# Altium PCB LittleFOC-pcb-0.1.0.PcbDoc
Units mil, origin at the board's own origin, x right, y up, seen from the top; angles counter-clockwise.
Board outline 670.03 x 1010.03 mil, 2 copper layers (Top Layer, Bottom Layer); 24 components, 34 nets, 121 pads, 0 vias.
Unrouted connection lines stored in the file: 44.
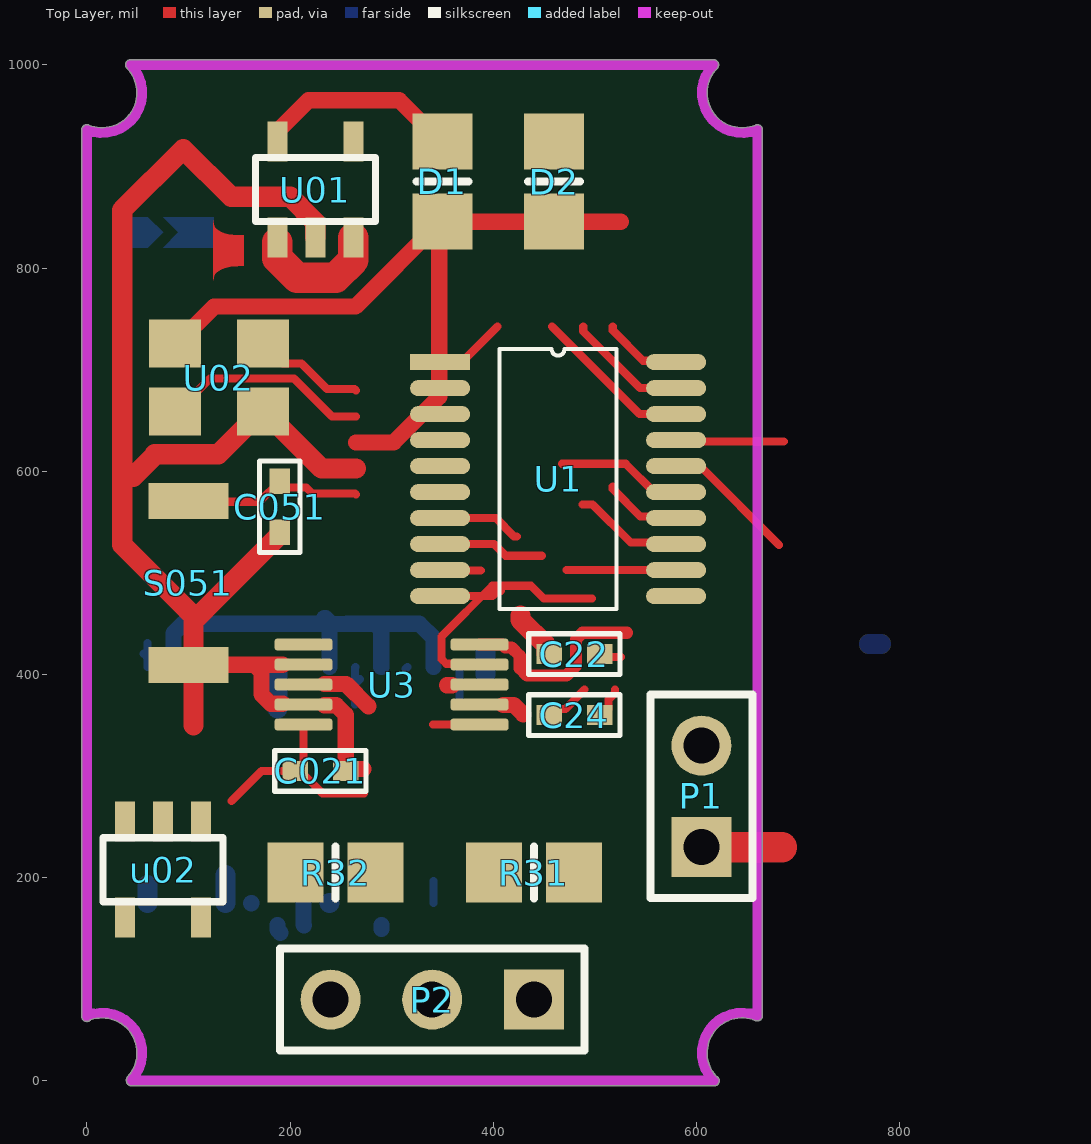
[diagram p0: Top Layer view]
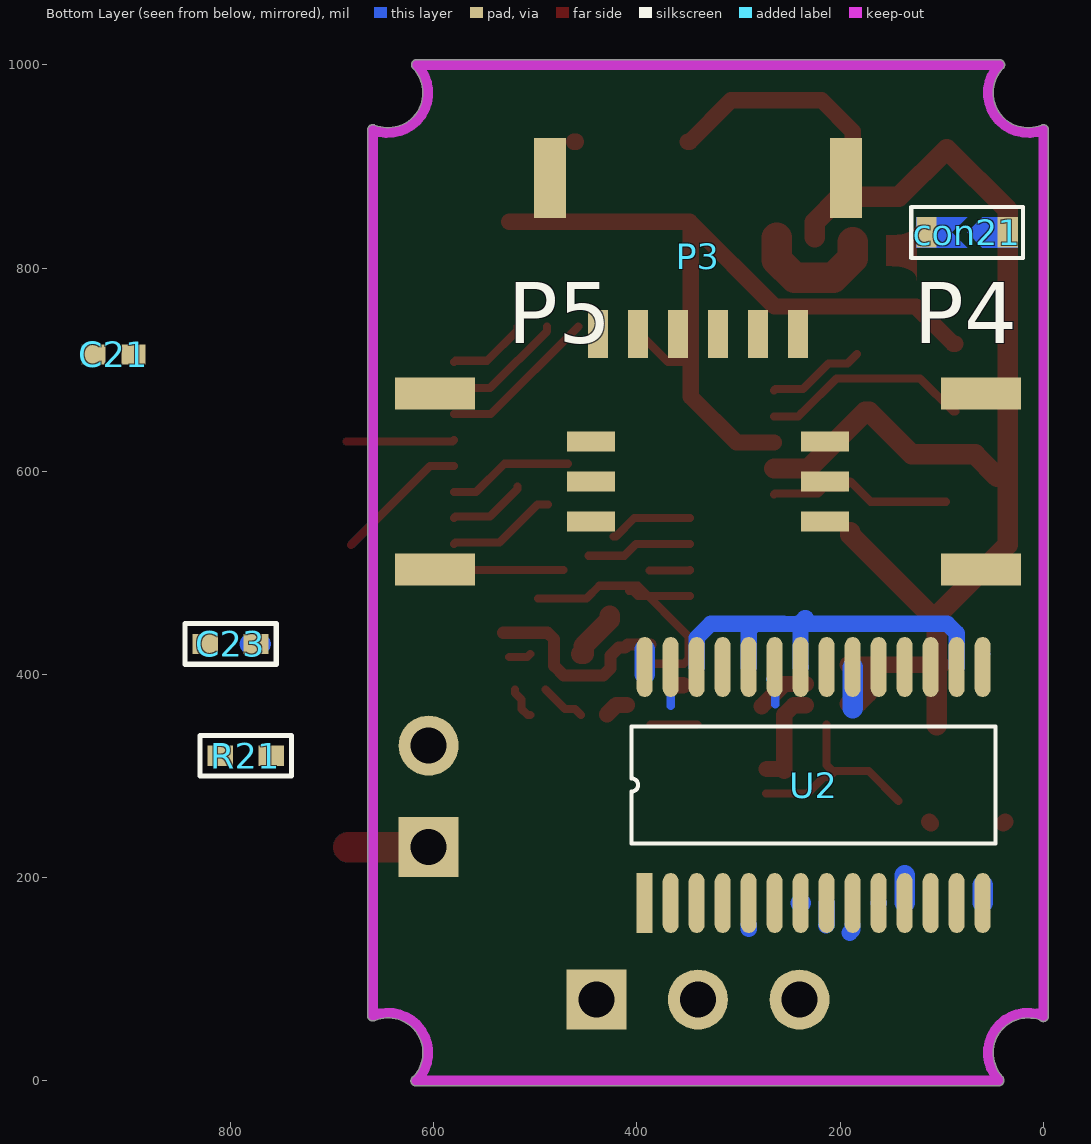
[diagram p1: Bottom Layer view, seen from below]

## Layer stack, top to bottom
Top Solder: solder mask 0.4, Solder Resist, Dk 3.5
Top Layer: signal copper 1.4
Dielectric 1: dielectric 12.6, FR-4, Dk 4.8
Bottom Layer: signal copper 1.4
Bottom Solder: solder mask 0.4, Solder Resist, Dk 3.5

## Board outline
3.71,59.99 cw(c0,63.37) -5.01,63.37 -5.01,936.06 cw(c0,936.06) 1.92,940.69 ccw(c15.04,972.44) 49.39,972.44 ccw(c15.04,972.44) 39.6,996.46 ccw(c15.04,972.44) 39.57,996.49 39.6,996.46 cw(c43.16,1000) 38.14,1000 cw(c43.16,1000) 43.19,1005.01 616.84,1005.01 cw(c616.84,1000) 621.86,1000 cw(c616.84,1000) 620.41,996.47 cw(c644.96,972.44) 620.43,996.49 620.41,996.47 ccw(c644.96,972.44) 658.08,940.69 cw(c660,936.06) 665.01,936.06 cw(c660,936.06) 665.01,936.06 665.01,63.94 cw(c660,63.94) 658.08,59.31 ccw(c644.96,27.56) 619.38,4.63 cw(c617.45,0) 622.46,0 cw(c617.45,0) 617.45,-5.01 611.22,-5.01 cw(c611.22,0) 611.22,-5.01 611.22,-5.02 ccw(c611.22,0) 611.26,-5.01 611.22,-5.02 44.04,-5.02 cw(c44.04,0) 39.04,0.47 cw(c44.04,0.93) 40.34,4.32 ccw(c15.04,27.56) 49.39,27.56 ccw(c15.04,27.56)

## Design rules (kind name [scope] priority, off if disabled: settings)
Clearance chip_pin [HasFootprint('QFN24')] p1: gap=5 ignorepadtopadclearanceinfootprint=FALSE
Clearance [All] p2: gap=5 ignorepadtopadclearanceinfootprint=FALSE
HoleSize [All] p1: absolutevalues=TRUE maxlimit=20 minlimit=10 maxpercent=80.000 minpercent=20.000
PolygonConnect [All] p1: connectstyle=Relief reliefconductorwidth=10 reliefentries=4 polygonreliefangle="90 Angle" airgapwidth=10
RoutingVias [All] p1: holewidth=10 width=20 viastyle="Through Hole" minholewidth=10 minwidth=20 maxholewidth=20 maxwidth=40
SolderMaskExpansion [All] p1: expansion=4 istentingtop=FALSE
Width VCC [InNet('VCC')or InNet('VCC_in')] p1: maxlimit=30 minlimit=20 preferedwidth=20
Width GND [InNet('GND')] p2: maxlimit=30 minlimit=8 preferedwidth=20
Width Power [(InNet('OUTPUT1') OR InNet('OUTPUT2') OR InNet('OUTPUT3') OR InNet('3V3')  OR InNet('PGND1') OR InNet('PGND3')  OR InNet('NetC011_1') OR InNet('NetD1_1')  OR InNet('NetD2_1'))] p3: maxlimit=20 minlimit=10 preferedwidth=15
Width signal [All] p4: maxlimit=15 minlimit=8 preferedwidth=8
29 further rules are at their usual default settings.

## Components (designator, comment, footprint, x,y, rotation, side; value= is the part's Value field where it differs from the comment)
C21 "Cap" 0402 915,715 r0 bottom value=10uF
C021 "Cap" 0402R 230,305 r0 top value=1uF
C22 "Cap" 0402R 480,420 r0 top value=0.1uF
C23 "Cap" 0402R 800,430 r180 bottom value=0.47uF
C24 "Cap" 0402R 480,360 r180 top value=0.01uF
C051 "Cap" 0402R 190,565 r270 top value=0.1μF
con21 "connector" connector 75,835 r0 bottom
D1 "Diode" 6-0805_M 350,885 r270 top
D2 "Diode" 6-0805_M 460,885 r270 top
P1 "Header 2" HDR1X2 605,230 r90 top
P2 "Header 3" HDR1X3 440,80 r180 top
P3 "SH1.0 6p" "SH1.0 6p" 339.68,927.91 r0 bottom
P4 "SH1.0 3p" "SH1.0 3p" 22.09,590 r90 bottom
P5 "SH1.0 3p" "SH1.0 3p" 637.91,590 r270 bottom
R21 "Res1" 0402R 785,320 r0 bottom value=10K
R31 "Res1" 6-0805_M 440,205 r180 top value="20m 0.1W"
R32 "Res1" 6-0805_M 245,205 r0 top value="20m 0.1W"
S051 "SW-PB" MPTCFP2 100,490 r90 top
U01 "SPX3819" SOT23-5 187.6,830 r180 top
U1 "STM32G030F6P6" TSSOP20 347.72,707.36 r0 top
u02 "LP3992-15B5F" SOT23-5 112.4,255 r0 top
U02 "OSC 16Mhz" SMD3225 130,692.08 r0 top
U2 "DRV8313" TSSOP28 392.36,175 r90 bottom
U3 "INA2181A2IDSQR" VSSOP-10pin 300,390 r0 top

## Footprints (in the part's own frame and the unit in brackets; to place one, negate y for a bottom-side part, rotate by r counter-clockwise, add the part's x,y. Pads: shape width x height; smd on the part's side, far side on the other; paste and mask are expansions set on the pad)
6-0805_M [mm] "Chip Resistor, Body 2.0x1.2mm, IPC Low Density"
  rect 1.4x1.5 smd: 1(-1,0) 2(1,0)
  silkscreen extent 0,-0.65 0,0.65, body extent -1.07,-0.7 1.07,0.7, height 0.7
0402 [mm] "Chip Capacitor, Body 1.0x0.5mm, IPC High Density"
  rect 0.6x0.5 smd: 1(-0.5,0) 2(0.5,0)
  body extent -0.55,-0.3 0.55,0.3, height 1.3
0402R [mil]
  rect 25x20 smd: 1(-25,0) 2(25,0)
  silkscreen extent -45,-20 45,20
connector [mil]
  rect 20x30 smd: 1(-40,0) 2(40,0)
  Top Layer region: -50,15 -50,-15 -15,-15 0,0 -15,15
  Top Layer region: 50,15 50,-15 0,-15 15,0 0,15
  silkscreen extent -55,-25 55,25
HDR1X2 [mm] "Connector; Header; 2 Position"
  rect 1.5x1.5 hole 0.9: 1(0,0)
  round 1.5 hole 0.9: 2(2.54,0)
  silkscreen extent -1.27,-1.27 3.81,1.27
HDR1X3 [mm] "Connector; Header; 3 Position"
  rect 1.5x1.5 hole 0.9: 1(0,0)
  round 1.5 hole 0.9: 2(2.54,0) 3(5.08,0)
  silkscreen extent -1.27,-1.27 6.35,1.27
MPTCFP2 [mm]
  rect 0.9x2 smd: 1(-2.05,0) 2(2.05,0)
"SH1.0 3p" [mm]
  rect 0.5x1.2 smd: 1(-1,4.9) 2(0,4.9) 3(1,4.9)
  rect 0.8x2 smd: 4(-2.2,1) 4(2.2,1)
"SH1.0 6p" [mm]
  rect 0.5x1.2 smd: 1(-2.5,4.9) 2(-1.5,4.9) 3(-0.5,4.9) 4(0.5,4.9) 5(1.5,4.9) 6(2.5,4.9)
  rect 0.8x2 smd: 7(-3.7,1) 7(3.7,1)
SMD3225 [mm]
  rect 1.3x1.2 smd: 1(-1.1,-0.85) 2(1.1,-0.85) 3(1.1,0.85) 4(-1.1,0.85)
SOT23-5 [mm]
  rect 0.5x1 smd: 1(0,0) 2(-0.95,0) 3(-1.9,0) 4(-1.9,-2.4) 5(0,-2.4)
  silkscreen extent -2.45,-2 0.55,-0.4
TSSOP20 [mm]
  rect 1.5x0.4 smd: 1(0,0)
  oval 1.5x0.4 smd: 2(0,-0.65) 3(0,-1.3) 4(0,-1.95) 5(0,-2.6) 6(0,-3.25) 7(0,-3.9) 8(0,-4.55) 9(0,-5.2) 10(0,-5.85) 11(5.9,-5.85) 12(5.9,-5.2) 13(5.9,-4.55) 14(5.9,-3.9) 15(5.9,-3.25) 16(5.9,-2.6) 17(5.9,-1.95) 18(5.9,-1.3) 19(5.9,-0.65) 20(5.9,0)
  silkscreen extent 1.48,-6.18 4.42,0.33
TSSOP28 [mm]
  rect 1.5x0.4 smd: 1(0,0)
  oval 1.5x0.4 smd: 2(0,-0.65) 3(0,-1.3) 4(0,-1.95) 5(0,-2.6) 6(0,-3.25) 7(0,-3.9) 8(0,-4.55) 9(0,-5.2) 10(0,-5.85) 11(0,-6.5) 12(0,-7.15) 13(0,-7.8) 14(0,-8.45) 15(5.9,-8.45) 16(5.9,-7.8) 17(5.9,-7.15) 18(5.9,-6.5) 19(5.9,-5.85) 20(5.9,-5.2) 21(5.9,-4.55) 22(5.9,-3.9) 23(5.9,-3.25) 24(5.9,-2.6) 25(5.9,-1.95) 26(5.9,-1.3) 27(5.9,-0.65) 28(5.9,0)
  silkscreen extent 1.48,-8.78 4.42,0.33
VSSOP-10pin [mm]
  rrect50% 1.45x0.3 smd: 1(-2.2,1) 2(-2.2,0.5) 3(-2.2,0) 4(-2.2,-0.5) 5(-2.2,-1) 6(2.2,-1) 7(2.2,-0.5) 8(2.2,0) 9(2.2,0.5) 10(2.2,1)

## Part data
C21 C021 C22 C23 C24 C051: library part "Cap Semi", "Capacitor (Semiconductor SIM Model)", LatestRevisionDate=29-May-2009, LatestRevisionNote="IPC-7351 Footprint Added.", PackageDescription="Chip Capacitor", PackageReference=C1206, Published=8-Jun-2000, Publisher="Altium Limited"
D1 D2: "Default Diode", Code_JEDEC=DO-214-AB, LatestRevisionDate=17-Jul-2002, LatestRevisionNote="Re-released for DXP Platform.", PackageDescription="DO-214-AB/SMC; 2 C-Bend Leads; Body 7.9 x 5.9 mm, inc. leads (LxW)", PackageReference=SMC, PackageVersion=Sep-1996, Published=8-Jun-2000, Publisher="Altium Limited"
P1: "Header, 2-Pin", LatestRevisionDate=17-Jul-2002, LatestRevisionNote="Re-released for DXP Platform.", Publisher="Altium Limited"
P2: "Header, 3-Pin", LatestRevisionDate=17-Jul-2002, LatestRevisionNote="Re-released for DXP Platform.", Publisher="Altium Limited"
R21 R31 R32: "Resistor", LatestRevisionDate=17-Jul-2002, LatestRevisionNote="Re-released for DXP Platform.", PackageDescription="Axial Device, Thru-Hole; 2 Leads; 0.3 in Pin Spacing", PackageReference=AXIAL-0.3, Published=8-Jun-2000, Publisher="Altium Limited"
S051: "Switch", LatestRevisionDate=17-Jul-2002, LatestRevisionNote="Re-released for DXP Platform.", PackageDescription="Switch; 2 Leads", PackageReference=SPST-2, Published=24-Mar-1999, Publisher="Altium Limited"

## Nets (pads, with @x,y where several pads share a name; then routed paths per layer and width w, separated by ;. In a path a pad name is that pad's centre, name@x,y a point inside that pad or via, vN(x,y) a via of type N, cw(c..) or ccw(c..) an arc to the next point about the centre after c; other vN are vias at no path point)
1V5: C021.1 u02.5 U3.5 U3.6 | length 248.4
  Top Layer w8: 142.4,275.51 171.89,305 C021.1 ; U3.5 213.39,311 207.39,305 C021.1 ; 272.94,282.94 232.06,282.94 216,299 211,299 C021.1 ; 340.63,350.63 U3.6
3V3: D1.2 D2.2 P3.1 U1.4 u02.1 u02.3 U02.4 U2.16 U2.22 U2.24 U2.26 U3.10 | length 1605.1
  Top Layer w12: U3.10 409.06,429.37 411.84,426.59 417.98,426.59 426.16,418.42 426.16,406.03 433.19,399 472.06,399 481.5,408.44 481.5,434.56 487.94,441 531.69,441
  Top Layer w16: u02.3 u02.3@39.44,253.16 ; U02.4 88.66,725.55 125.28,762.17 264.57,762.17 348.03,845.63 D1.2 ; u02.1@110.56,253.16 u02.1 ; 265,628.23 265.13,628.35 302.02,628.35 347,673.34 347,842.63 D1.2 ; 525.63,845.63 D2.2 D1.2
  Bottom Layer w16: U2.16 85.28,440.44 94.65,449.81 233.82,449.81 ; 233.82,455.28 234.9,455.28 240.57,449.62 255.57,449.62 255.76,449.81 283.82,449.81 ; U2.22 238.94,407.41 238.94,440.44 ; U2.24@290,428.69 U2.24 289.87,407.41 289.87,443.76 ; U2.26 341.18,435.91 327.28,449.81 ; 283.82,449.81 327.28,449.81 ; 283.82,449.81 289.87,443.76 ; U2.24@289.87,428.69 289.87,443.76 ; U2.24@289.87,428.69 289.87,443.76 ; U2.24@289.87,428.69 289.87,443.76 ; U2.24@289.87,428.69 289.87,443.76 ; 289.87,449.81 327.28,449.81 ; 289.87,449.81 327.28,449.81 ; 289.87,449.81 327.28,449.81 ; 289.87,449.81 327.28,449.81
ADC1_IN4: U1.11 U3.9 | length 236
  Top Layer w8: U3.9 385.78,410.52 353.76,410.52 349.07,415.2 349.07,437.27 399.07,487.28 437.12,487.28 449.71,474.68 497.28,474.68
ADC1_IN5: U1.12 U3.1 | length 107.8
  Top Layer w8: 472.21,502.64 U1.12
GND: C021.2 C21.2 C23.2 C051.2 P1.2 P3.6 P4.3 P5.3 R31.2 R32.2 S051.1 U01.2 U1.5 u02.2 U02.2 U2.7 U2.14 U2.20 U2.28 U3.2 U3.4 U3.8 | length 1533.4
  Top Layer w16: S051.1 100.2,409.49 105,409.49 165,409.49 ; U3.4@192.84,371.09 181.19,371.09 171.84,380.44 171.84,402.65 165,409.49 ; U3.2@192.84,409.49 171.84,409.49 165,409.49 ; U3.4@233.93,369.54 245.58,369.54 254.93,360.19 254.93,305.07 C021.2 257,307 272.2,307 ; 354.42,389.22 U3.8@359.56,389.22
  Top Layer w20: 45.63,594.64 66.71,615.72 66.71,616.71 129.43,616.71 171.34,658.62 U02.2 175.28,658.62 231.25,602.64 265,602.64 ; 105,350 105,409.49 105,455 106.25,456.25 ; C051.2 190,537.5 108.75,456.25 106.25,456.25 ; U01.2 225,845.25 200.25,870 142.12,870 95,917.12 35,857.12 35,527.5 106.25,456.25
  Bottom Layer w20: U2.14 U2.14@59.68,192.4 ; 187.64,366.46 U2.20 ; U2.28@392.36,400.28 U2.28@392.36,424.69 ; C23.2@770,430 C23.2@781.29,430
NetC22_2: C22.2 U2.3 | length 43.6
  Top Layer w8: C22.2 508,417 525.7,417
  Bottom Layer w8: U2.3 U2.3@341.18,196.65
NetC23_1: C23.1 R21.1 U2.15 | length 27.4
  Bottom Layer w8: U2.15@56.11,420.28 59.68,416.7 U2.15 ; U2.15@59.68,418.11 59.68,420.28 U2.15@59.68,431.03
NetC24_1: C24.1 U2.1 | length 32.7
  Top Layer w8: C24.1 507.5,360 513.5,366 513.5,375.25 520,381.75 520,385
NetC24_2: C24.2 U2.2 | length 45.4
  Top Layer w8: C24.2 461,366 471,366 490,385
NetD1_1: D1.1 U01.5 | length 201.8
  Top Layer w16: U01.5 187.6,934.33 218.27,965 307.4,965 348.03,924.37 D1.1
NetD041_2: 
nFAULT: R21.2 U1.10 U2.18 | length 62.2
  Top Layer w8: U1.10 399.15,477.05 404.47,482.36 407.72,482.36
nSLEEP: U1.9 U2.17 | length 40.1
  Top Layer w8: U1.9 347.99,502.36 387.72,502.36
NSRT: C051.1 S051.2 U1.6 | length 182.9
  Top Layer w8: S051.2@95.71,570 170,570 C051.1 195.96,584.04 215.96,584.04 221.92,578.08 263.97,578.08 265,577.05
OSC_EN: U1.3 U02.1 | length 207.3
  Top Layer w8: U02.1 88.66,658.62 121.28,691.24 203.76,691.24 237.31,657.69 237.38,657.69 241.25,653.82 265,653.82
OSC_IN: U1.2 U02.3 | length 96.3
  Top Layer w8: U02.3@183.54,715.31 192.93,705.92 211.35,705.92 236.39,680.89 263.52,680.89 265,679.41
OUTPUT1: P2.1 U2.5 | length 4.1
  Bottom Layer w16: U2.5@290,149.42 U2.5@290,153.47
OUTPUT2: P2.2 U2.8 | length 33.9
  Bottom Layer w16: U2.8 213.23,153.6 U2.8@213.82,153.01 ; P2.2@321.76,88.24 P2.2@330,80
OUTPUT3: P2.3 U2.9 | length 8.8
  Bottom Layer w16: U2.9@187.76,153.47 187.76,148.59 190.52,145.83
PGND1: R31.1 U2.6 U3.7 | length 23.4
  Top Layer w16: U3.7@410,370 420.13,370 429.5,360.63
PGND3: R32.1 U2.10 U3.3 | length 52.5
  Top Layer w16: U3.3@233.93,390.54 255.18,390.54 277.18,368.53
  Bottom Layer w16: U2.10@161.92,174.87 U2.10
SPI1_CSN: P3.2 U1.7 | length 82.9
  Top Layer w8: U1.7 402.66,553.82 420.63,535.85 423.13,535.85
SPI1_MISO: P3.4 U1.16 | length 133.5
  Top Layer w8: U1.16 603.75,605 681.39,527.36
SPI1_MOSI: P3.5 U1.17 | length 106.6
  Top Layer w8: U1.17 581.48,629.11 685.97,629.11
SPI1_SCK: P3.3 U1.8 | length 104.7
  Top Layer w8: U1.8 400.78,528.23 412.16,516.85 447.72,516.85
SYS_SWCLK: U1.19 | length 119.3
  Top Layer w8: 488.57,742.36 488.57,737.69 544.49,681.77 U1.19
SYS_SWDIO: U1.18 | length 158
  Top Layer w8: 457.72,742.36 543.9,656.18 U1.18
TIM3_CH1: U1.13 U2.27 | length 146.9
  Top Layer w8: 487.72,567.36 497.72,567.36 535.37,529.71 578.52,529.71 U1.13
  Bottom Layer w8: 366.77,368.84 U2.27
TIM3_CH2: U1.14 U2.25 | length 79.1
  Top Layer w8: 517.72,584.86 517.72,582.36 544.78,555.3 578.52,555.3 U1.14
  Bottom Layer w8: U2.25@313.82,405.51 U2.25
TIM3_CH3: U1.15 U2.23 | length 168.2
  Top Layer w8: 467.72,607.36 530.39,607.36 558.35,579.41 U1.15
  Bottom Layer w8: 263.82,370.28 U2.23@263.82,390.28 ; U2.23 263.82,406.69 U2.23@263.82,390.28 ; U2.23@268.82,395.28 U2.23@263.82,390.28
USART1_RX: P4.2 P5.2 U1.1 | length 71.2
  Top Layer w8: U1.1 369.37,707.36 404.37,742.36
USART1_TX: P4.1 P5.1 U1.20 | length 79
  Top Layer w8: 517.72,742.36 517.72,738.56 547.58,708.7 578.67,708.7 U1.20
VCC: con21.1 P1.1 U01.1 U01.3 | length 210.1
  Top Layer w30: U01.1@187.6,825.31 187.6,817.12 187.6,809.59 206.87,790.31 244.83,790.31 262.4,807.89 U01.3 ; P1.1 684.24,230
  Bottom Layer w30: P1.1 P1.1@607.12,227.88
VCC_in: C21.1 C22.1 con21.2 U2.4 U2.11 | length 78.8
  Top Layer w20: 426.81,458 426.81,453.67 452.5,427.98 452.5,420 C22.1
  Bottom Layer w20: U2.11 U2.11@136.46,202.64
pads on no net: D2.1 P3.7 P4.4 P5.4 U01.4 u02.4 U2.12 U2.13 U2.19 U2.21
copper on no net: | length 2
  Top Layer w16: 460,924.37 461.97,924.37

## Keep-outs
Keep-Out Layer:
  lines w10: 0,63.37 0,936.06 ccw(c15.04,972.44) 43.16,1000 616.84,1000 ccw(c644.96,972.44) 660,936.06 660,63.94 ccw(c644.96,27.56) 616.84,0 ; 0,63.94 cw(c15.04,27.56) 44.04,0.93 ; 44.04,0 611.22,0 ; 617.45,0 611.22,0 ; 611.22,0 611.22,0